# Altium PCB LED.PcbDoc
Units mm, origin at the board's own origin, x right, y up, seen from the top; angles counter-clockwise.
Board outline 51.1 x 33.9 mm, 2 copper layers (Top Layer, Bottom Layer); 3 components, 12 nets, 28 pads, 0 vias.
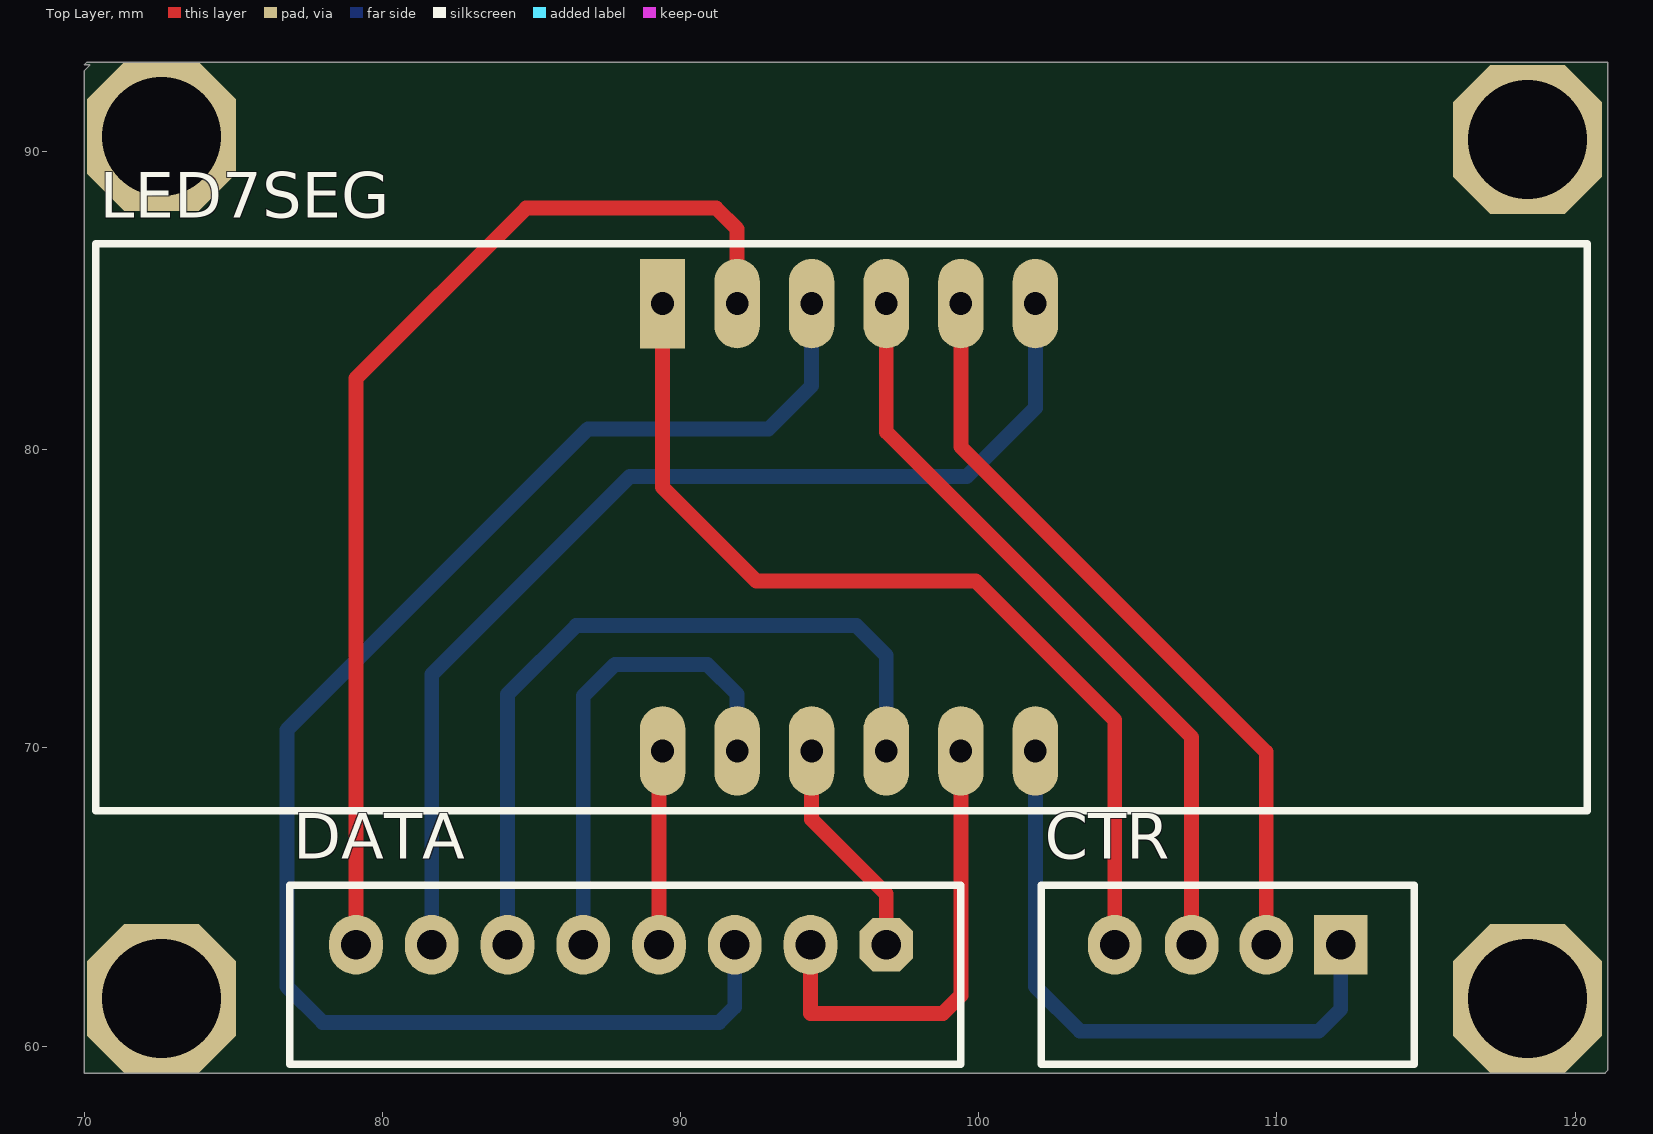
[diagram p0: Top Layer view]
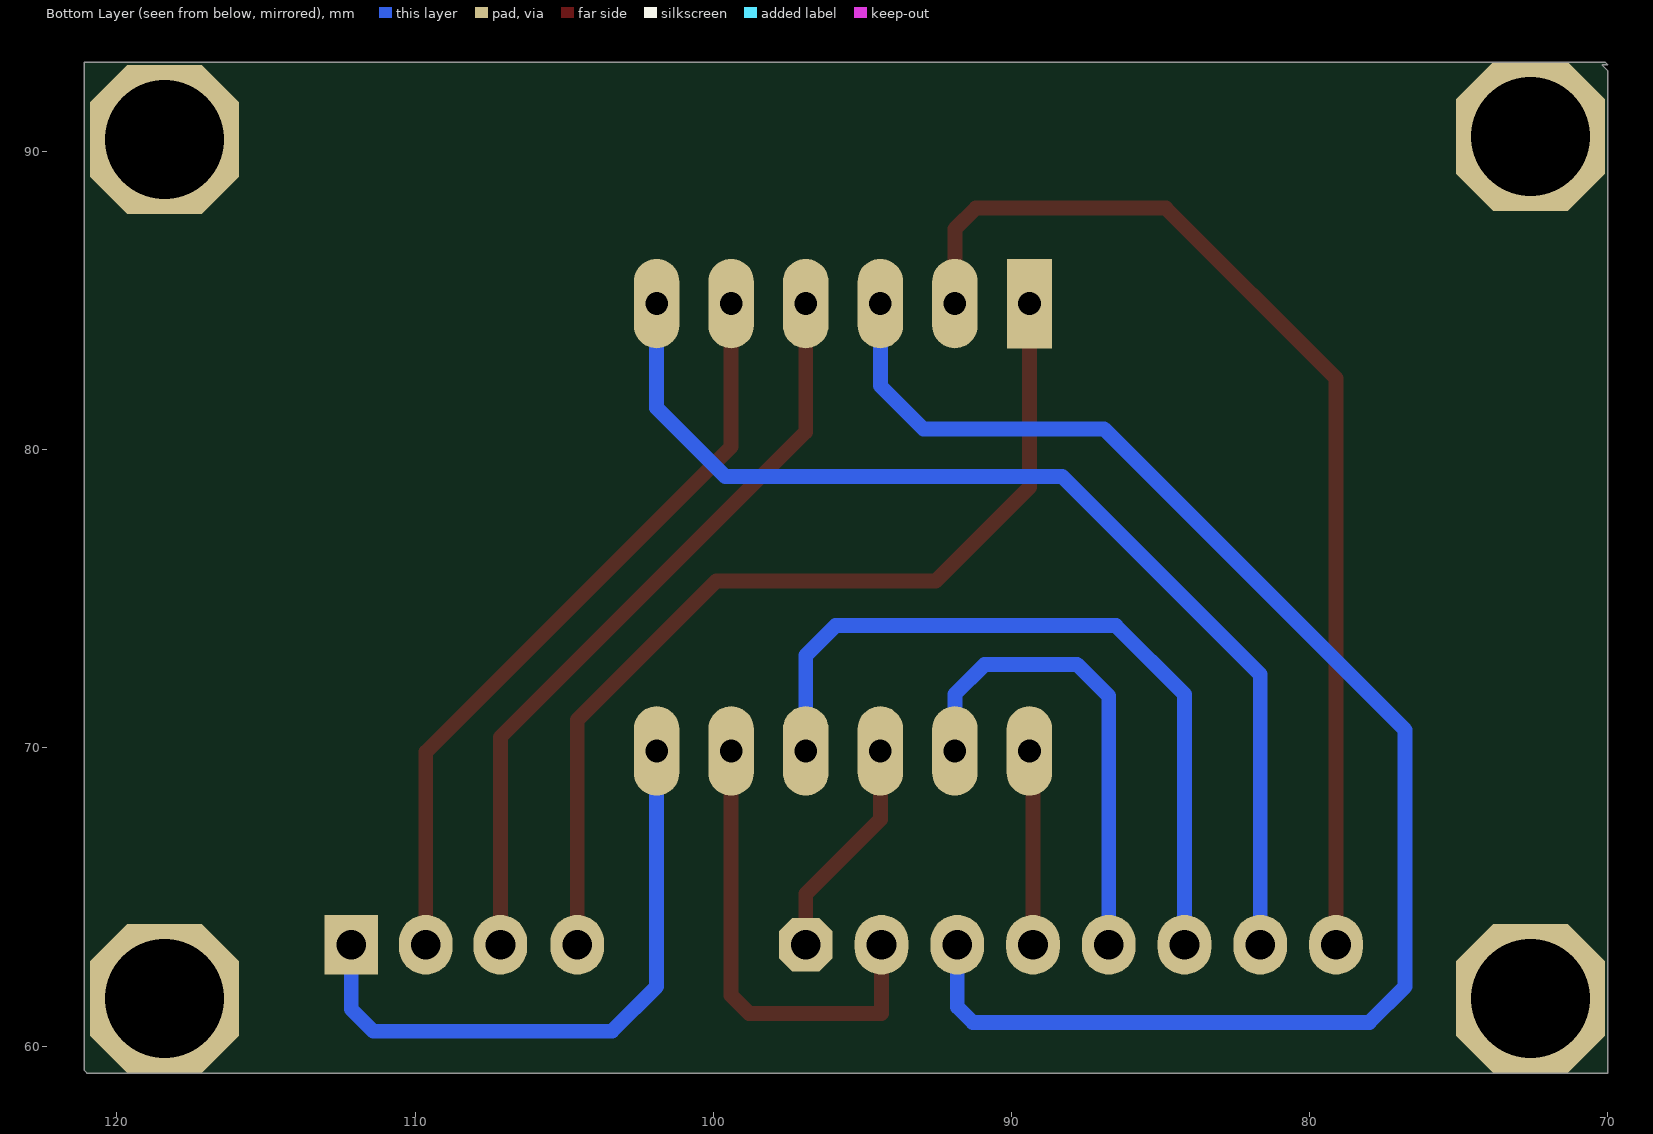
[diagram p1: Bottom Layer view, seen from below]

## Layer stack, top to bottom
Top Layer: signal copper 0.0356
Dielectric: dielectric 0.32, FR-4, Dk 4.8
Bottom Layer: signal copper 0.0356

## Board outline
70,92.9 70.1,93 121.1,93 121.1,59.2 121,59.1 70,59.1 70,92.7 70.2,92.9

## Design rules (kind name [scope] priority, off if disabled: settings)
Clearance [All] p1: gap=0.254
PolygonConnect [All] p1: connectstyle=Relief reliefconductorwidth=0.254 reliefentries=4 polygonreliefangle="90 Angle"
RoutingVias [All] p1: holewidth=0.711 width=1.27 viastyle="Through Hole" minholewidth=0.711 minwidth=1.27 maxholewidth=0.711 maxwidth=1.27
SilkscreenOverComponentPads [All] p1: minsilkscreentomaskgap=0.254
SolderMaskExpansion [All] p1: expansion=0.102
Width [All] p1: maxlimit=2 minlimit=0.3 preferedwidth=0.5
27 further rules are at their usual default settings.

## Components (designator, comment, footprint, x,y, rotation, side; value= is the part's Value field where it differs from the comment)
CTR "Header 4" "CAP 4" 107.1,63.4 r180 top
DATA "Header 8" Cap_8 96.9,63.4 r180 top
LED7SEG "LED7SEG" LED7SEGMENT_4 95.4,80.9 r0 top

## Footprints (in the part's own frame and the unit in brackets; to place one, negate y for a bottom-side part, rotate by r counter-clockwise, add the part's x,y. Pads: shape width x height; smd on the part's side, far side on the other; paste and mask are expansions set on the pad)
"CAP 4" [mm]
  rect 1.8x2 hole 1: 1(-5.04,0)
  oval 1.8x2 hole 1: 2(-2.54,0) 3(-0.04,0) 4(2.54,0)
  silkscreen extent -7.5,-2 5,4
Cap_8 [mm]
  oct 1.8x1.8 hole 1: 1(0,0)
  oval 1.8x2 hole 1: 2(2.54,0) 3(5.08,0) 4(7.62,0) 5(10.16,0) 6(12.7,0) 7(15.24,0) 8(17.78,0)
  silkscreen extent -2.5,-2 20,4
LED7SEGMENT_4 [mm]
  rect 1.5x3 hole 0.762: 1(-6,4)
  oval 1.524x3 hole 0.762: 2(-3.5,4) 3(-1,4) 4(1.5,4) 5(4,4) 6(6.5,4) 7(6.5,-11) 8(4,-11) 9(1.5,-11) 10(-1,-11) 11(-3.5,-11) 12(-6,-11)
  silkscreen extent -25,-13 25,6

## Part data
CTR: "Header, 4-Pin"
DATA: "Header, 8-Pin"

## Free pads (board coordinates)
  oct 5x5 hole 4: 9(72.6,61.6) 9(72.6,90.5) 9(118.4,61.6) 9(118.4,90.4)

## Nets (pads, with @x,y where several pads share a name; then routed paths per layer and width w, separated by ;. In a path a pad name is that pad's centre, name@x,y a point inside that pad or via, vN(x,y) a via of type N, cw(c..) or ccw(c..) an arc to the next point about the centre after c; other vN are vias at no path point)
NetCTR_1: CTR.1 LED7SEG.7 | length 21.2
  Bottom Layer w0.5: LED7SEG.7 101.9,62 103.4,60.5 111.4,60.5 112.14,61.24 CTR.1
NetCTR_2: CTR.2 LED7SEG.5 | length 25.7
  Top Layer w0.5: LED7SEG.5 99.4,80.1 109.64,69.86 CTR.2
NetCTR_3: CTR.3 LED7SEG.4 | length 25.7
  Top Layer w0.5: LED7SEG.4 96.9,80.6 107.14,70.36 CTR.3
NetCTR_4: CTR.4 LED7SEG.1 | length 32.1
  Top Layer w0.5: LED7SEG.1 89.4,78.74 92.54,75.6 99.9,75.6 104.56,70.94 CTR.4
NetDATA_1: DATA.1 LED7SEG.10 | length 7.5
  Top Layer w0.5: LED7SEG.10 94.4,67.6 96.9,65.1 DATA.1
NetDATA_2: DATA.2 LED7SEG.8 | length 15.8
  Top Layer w0.5: DATA.2 94.36,61.1 98.8,61.1 99.4,61.7 LED7SEG.8
NetDATA_3: DATA.3 LED7SEG.3 | length 51.6
  Bottom Layer w0.5: DATA.3 91.82,61.32 91.3,60.8 78,60.8 76.8,62 76.8,70.6 86.9,80.7 92.956,80.7 94.4,82.144 LED7SEG.3
NetDATA_4: DATA.4 LED7SEG.12 | length 6.5
  Top Layer w0.5: DATA.4 89.28,69.78 LED7SEG.12
NetDATA_5: DATA.5 LED7SEG.11 | length 16.3
  Bottom Layer w0.5: DATA.5 86.74,71.74 87.8,72.8 90.9,72.8 91.9,71.8 LED7SEG.11
NetDATA_6: DATA.6 LED7SEG.9 | length 25.7
  Bottom Layer w0.5: DATA.6 84.2,71.8 86.5,74.1 95.9,74.1 96.9,73.1 LED7SEG.9
NetDATA_7: DATA.7 LED7SEG.6 | length 36.5
  Bottom Layer w0.5: DATA.7 81.66,72.46 88.3,79.1 99.6,79.1 101.9,81.4 LED7SEG.6
NetDATA_8: DATA.8 LED7SEG.2 | length 36.9
  Top Layer w0.5: DATA.8 79.12,82.397 84.823,88.1 91.2,88.1 91.9,87.4 LED7SEG.2